# Altium PCB Harness_robottino.PcbDoc
Units mm, origin at the board's own origin, x right, y up, seen from the top; angles counter-clockwise.
Board outline 20 x 21.25 mm, 4 copper layers (Top Layer, Internal Plane 1, Internal Plane 2, Bottom Layer); 6 components, 8 nets, 34 pads, 2 vias.
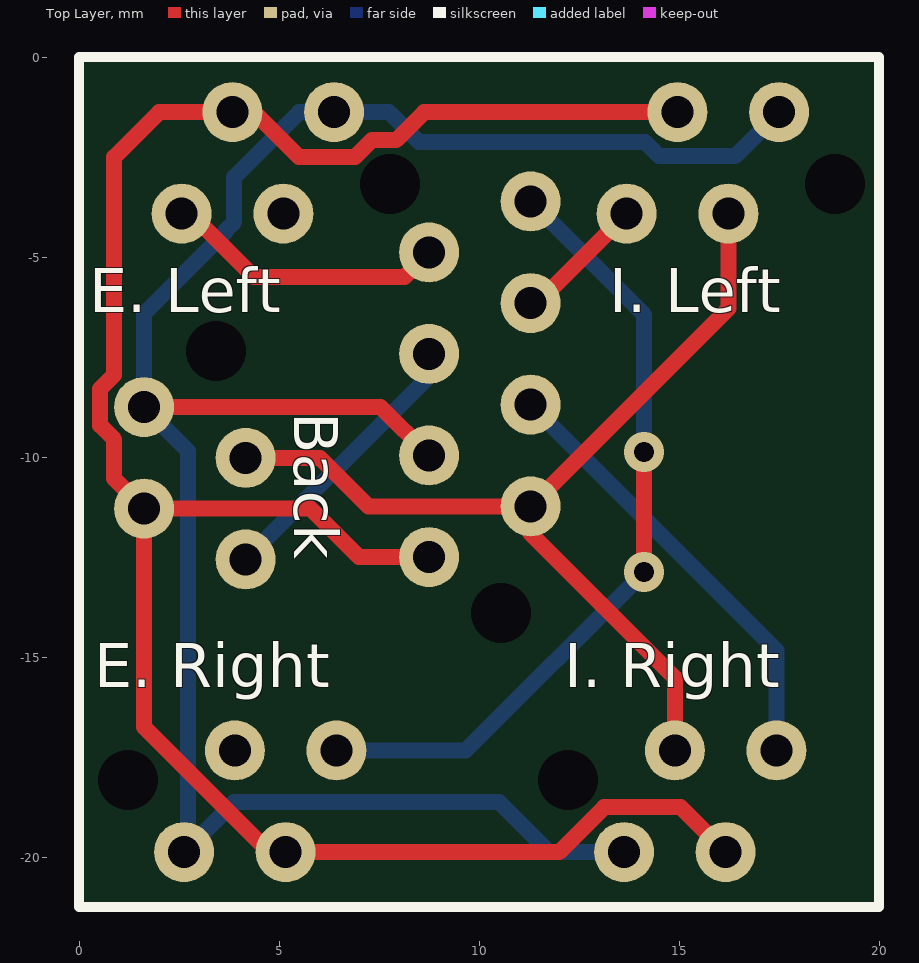
[diagram p0: Top Layer view]
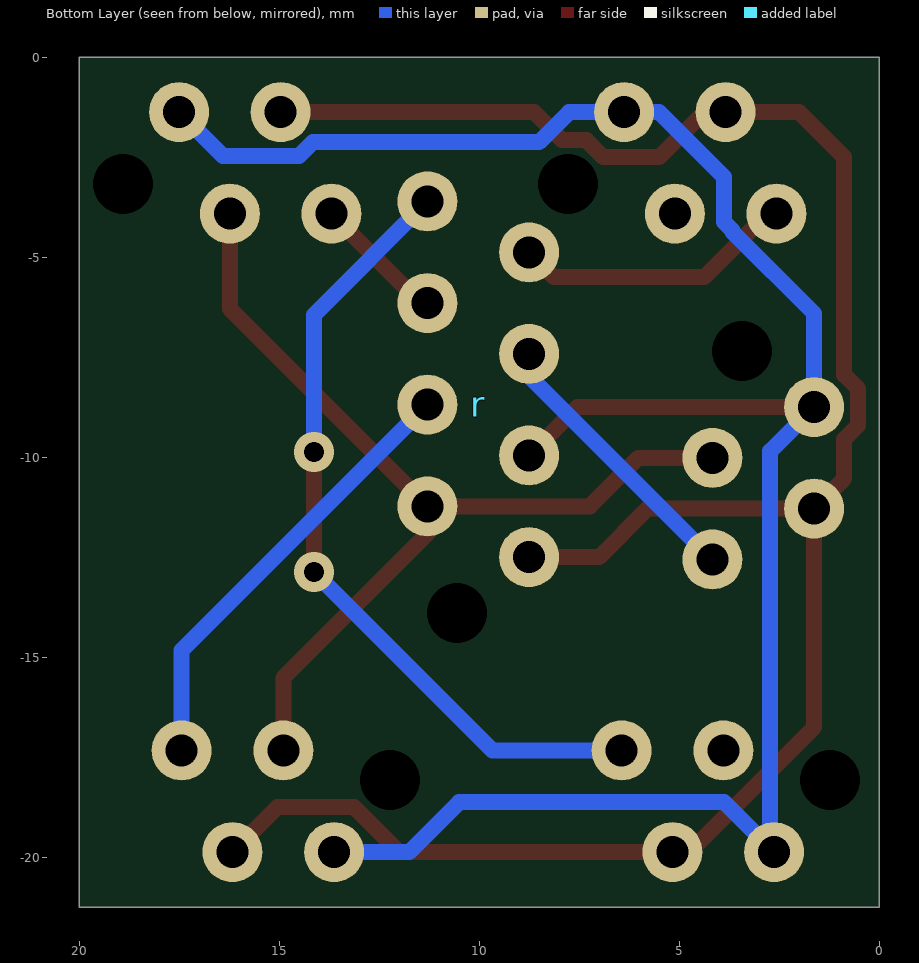
[diagram p1: Bottom Layer view, seen from below]
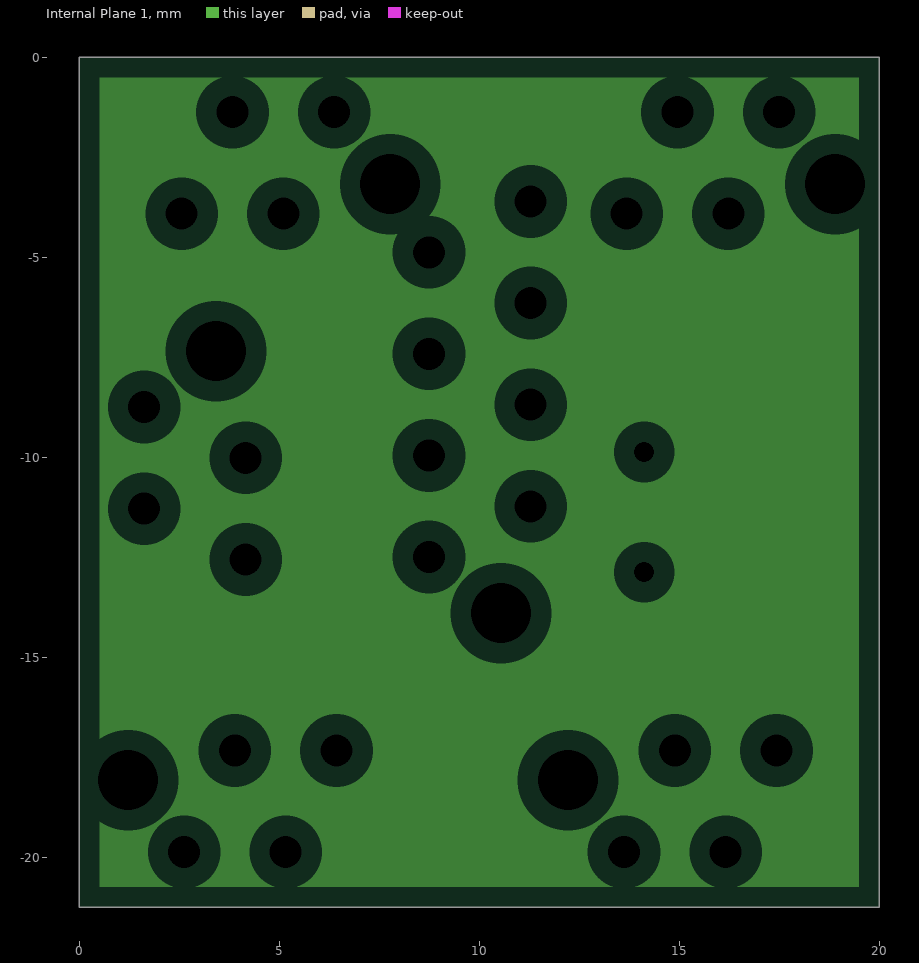
[diagram p2: Internal Plane 1, clearances drawn from the general rule]
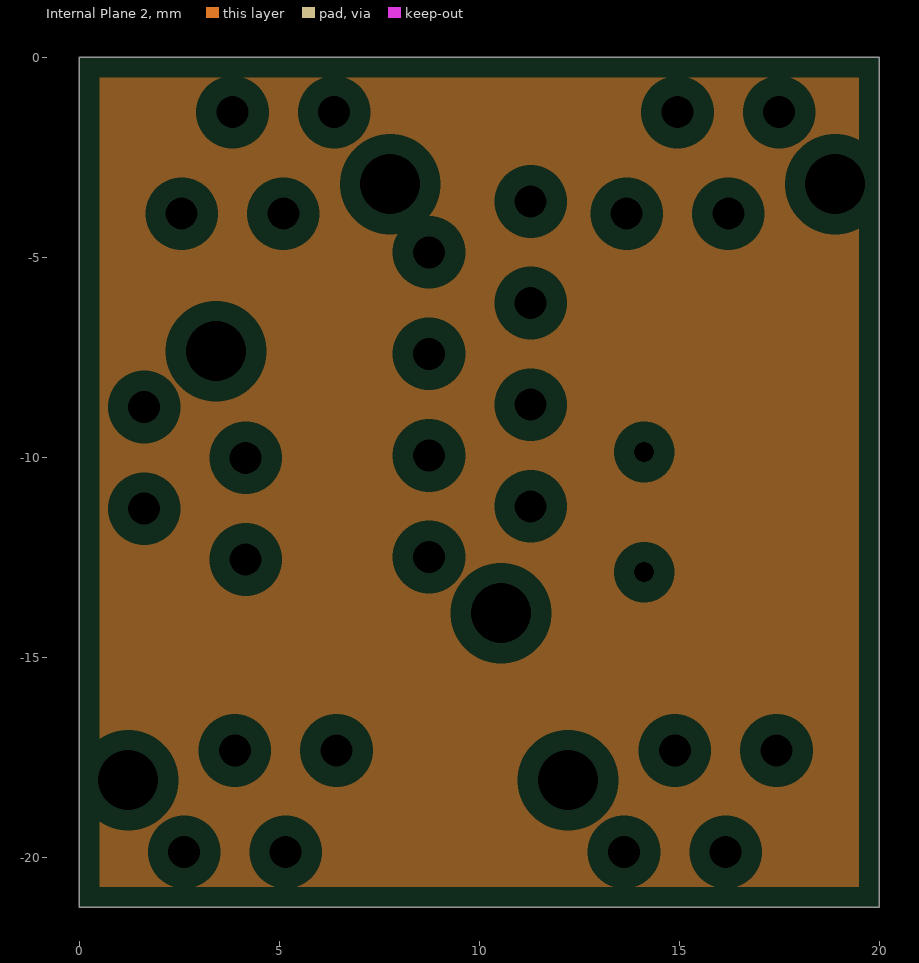
[diagram p3: Internal Plane 2, clearances drawn from the general rule]
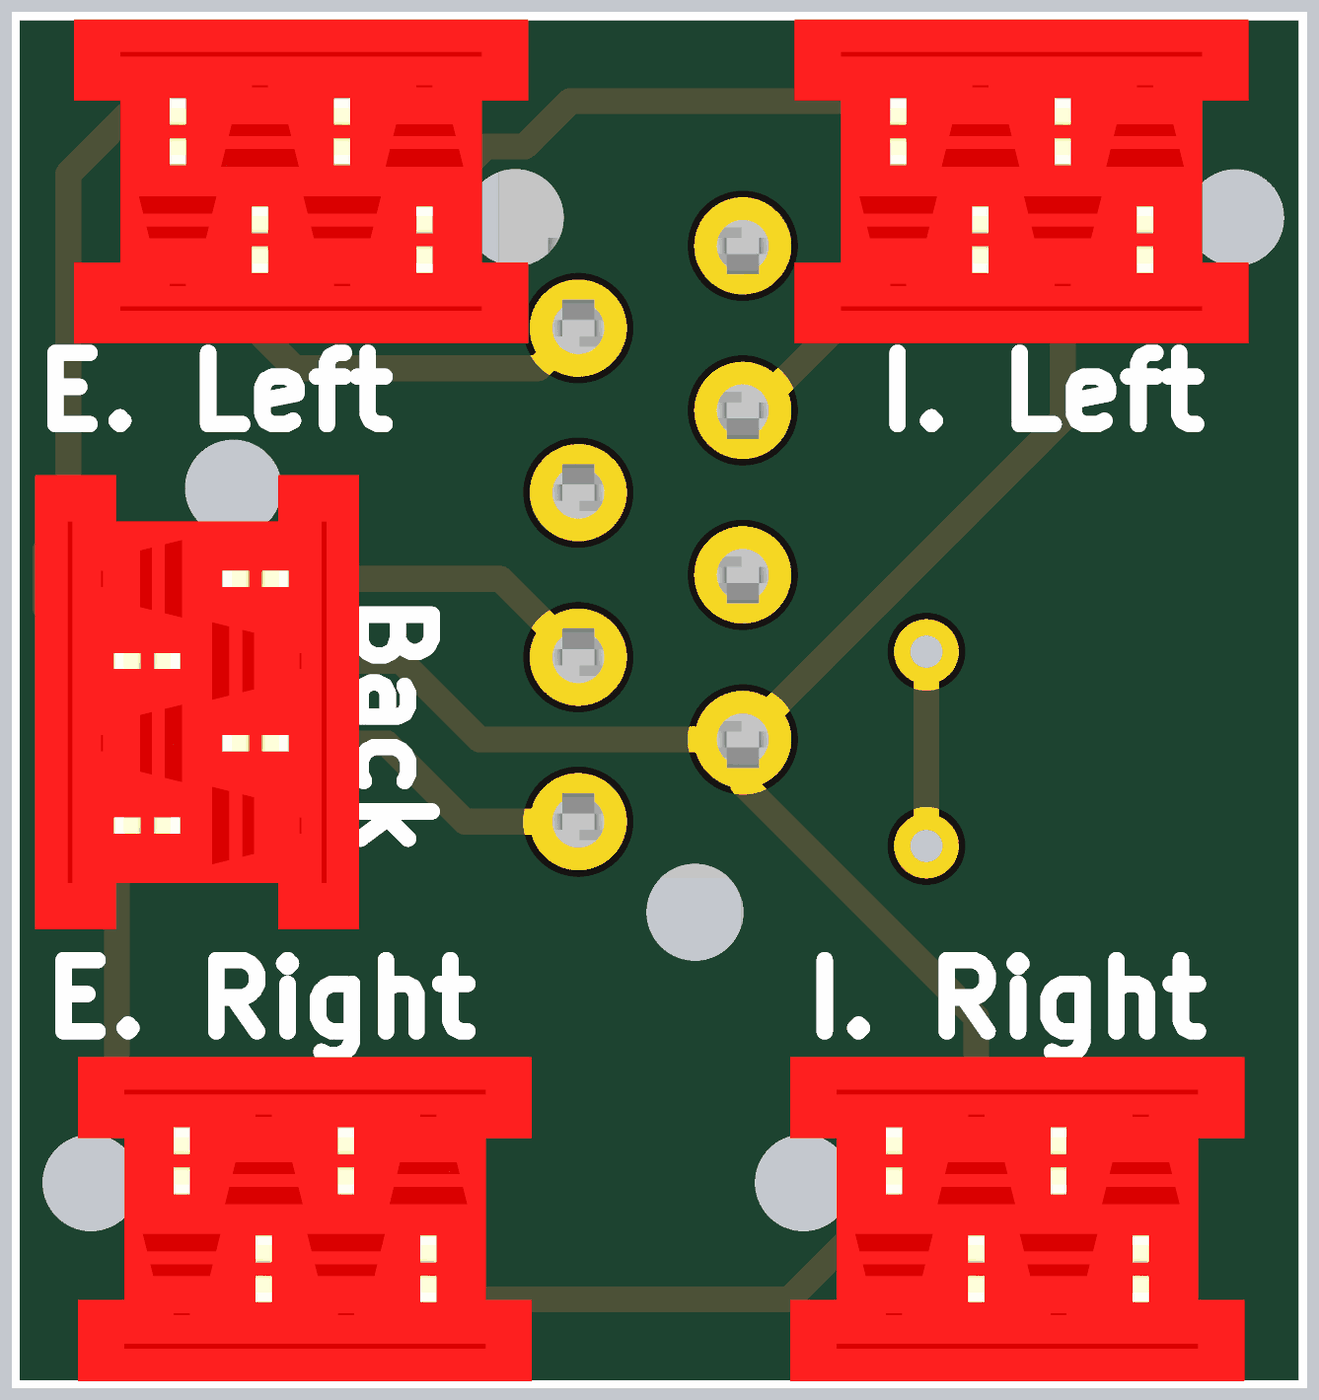
[diagram p4: 3D render of the assembled board from above, using the file's embedded part models]

## Layer stack, top to bottom
Top Layer: signal copper 0.0356
Dielectric: dielectric 0.32, FR-4, Dk 4.8
Internal Plane 1: plane copper 0.0356
Dielectric: dielectric 0.32, FR-4, Dk 4.8
Internal Plane 2: plane copper 0.0356
Dielectric: dielectric 0.32, FR-4, Dk 4.8
Bottom Layer: signal copper 0.0356

## Board outline
0,0 20,0 20,-21.25 0,-21.25

## Design rules (kind name [scope] priority, off if disabled: settings)
Clearance [All] p1: gap=0.15
PlaneClearance [All] p1: clearance=0.508
PlaneConnect [All] p1: planeconnectstyle=Direct reliefexpansion=0.508 reliefentries=4 reliefconductorwidth=0.254 reliefairgap=0.254
PolygonConnect PolygonConnect_nettie [InComponent('nt1') vs InNet('GND')] p1: connectstyle=Direct reliefconductorwidth=0.254 reliefentries=4 polygonreliefangle="90 Angle"
PolygonConnect PolygonConnect_pad [InComponent('U3') vs InNet('GND')] p2: connectstyle=Direct reliefconductorwidth=0.254 reliefentries=4 polygonreliefangle="90 Angle"
PolygonConnect [All] p3: connectstyle=Relief reliefconductorwidth=0.254 reliefentries=4 polygonreliefangle="90 Angle"
RoutingVias [All] p1: holewidth=0.35 width=0.6 viastyle="Through Hole" minholewidth=0.2 minwidth=0.4 maxholewidth=1.2 maxwidth=1
SilkscreenOverComponentPads [All] p1: minsilkscreentomaskgap=0.254
SolderMaskExpansion SolderMaskExpansion_via [IsVia] p1: expansion=-0.5
SolderMaskExpansion [All] p2: expansion=0.102
Width [All] p1: maxlimit=1 minlimit=0.203 preferedwidth=0.203
25 further rules are at their usual default settings.

## Components (designator, comment, footprint, x,y, rotation, side; value= is the part's Value field where it differs from the comment)
Back "I2C" TYCO/215079-4 1.625,-8.75 r90 top (schematic designator P2)
"E. Left" "I2C" TYCO/215079-4 6.375,-1.375 r0 top (schematic designator P5)
"E. Right" "I2C" TYCO/215079-4 2.625,-19.875 r180 top (schematic designator P6)
"I. Left" "I2C" TYCO/215079-4 17.5,-1.375 r0 top (schematic designator P1)
"I. Right" "I2C" TYCO/215079-4 13.625,-19.875 r180 top (schematic designator P3)
r "Header 8" TYCO/215079-8 8.75,-12.5 r270 bottom (schematic designator P4)

## Footprints (in the part's own frame and the unit in brackets; to place one, negate y for a bottom-side part, rotate by r counter-clockwise, add the part's x,y. Pads: shape width x height; smd on the part's side, far side on the other; paste and mask are expansions set on the pad)
TYCO/215079-4 [mm]
  round 1.5 hole 0.8: 1(0,0) 2(-1.27,-2.54) 3(-2.54,0) 4(-3.81,-2.54)
  round 1.3 hole 1.5 unplated: 5(1.4,-1.8)
  body extent -5.41,-3.74 1.6,1.26, height 4
TYCO/215079-8 [mm]
  round 1.3 hole 1.5 unplated: 0(1.4,-1.8)
  round 1.5 hole 0.8: 1(0,0) 2(-1.27,-2.54) 3(-2.54,0) 4(-3.81,-2.54) 5(-5.08,0) 6(-6.35,-2.54) 7(-7.62,0) 8(-8.89,-2.54)
  body extent -10.49,-3.77 1.6,1.23, height 4

## Part data
Back "E. Left" "E. Right" "I. Left" "I. Right": library part Micromatch-I2C, "Micromatch I2C Connector"
r: "Header, 8-Pin"

## Via types
v1: diameter 1, hole 0.5, Top Layer to Bottom Layer, 2 vias

## Nets (pads, with @x,y where several pads share a name; then routed paths per layer and width w, separated by ;. In a path a pad name is that pad's centre, name@x,y a point inside that pad or via, vN(x,y) a via of type N, cw(c..) or ccw(c..) an arc to the next point about the centre after c; other vN are vias at no path point)
GND: "E. Left.1" "E. Right.1" "I. Left.1" "I. Right.1" Back.1 r.3 | length 53.3
  Top Layer w0.4: Back.1 7.54,-8.75 r.3 ; 17.5,-1.625 17.5,-1.375
  Bottom Layer w0.4: 2.625,-19.875 2.725,-19.775 ; 13.625,-19.875 11.75,-19.875 10.5,-18.625 3.875,-18.625 2.725,-19.775 ; 17.5,-1.375 16.4,-2.475 14.504,-2.475 14.154,-2.125 8.5,-2.125 7.75,-1.375 6.375,-1.375 5.5,-1.375 3.875,-3 3.875,-4.125 3.665,-4.335 3.665,-4.371 1.625,-6.411 Back.1 2.725,-9.85 2.725,-19.775
IR3: "I. Right.4" r.4 | length 11.2
  Bottom Layer w0.4: r.4 17.435,-14.835 17.435,-17.335
IR4: Back.4 r.5 | length 7
  Bottom Layer w0.4: Back.4 8.75,-7.975 r.5
IR5: "I. Left.4" r.6 | length 3.3
  Top Layer w0.4: r.6 11.455,-6.15 13.69,-3.915
IR_SOURCE: "I. Left.2" "I. Right.2" Back.2 r.2 | length 24.6
  Top Layer w0.4: Back.2 6.02,-10.02 7.23,-11.23 r.2 ; 14.895,-17.335 14.895,-15.52 11.29,-11.915 r.2 ; 16.23,-3.915 16.23,-6.29 r.2
IRA: "E. Left.4" r.7 | length 7.1
  Top Layer w0.4: 2.565,-3.915 2.79,-3.915 4.375,-5.5 8.13,-5.5 r.7
IRB: "E. Right.4" r.8 | length 20
  Top Layer w0.4: v1(14.125,-12.875) v1(14.125,-9.875)
  Bottom Layer w0.4: 6.435,-17.335 9.665,-17.335 v1(14.125,-12.875) ; r.8 14.125,-6.445 v1(14.125,-9.875)
VCC: "E. Left.3" "E. Right.3" "I. Left.3" "I. Right.3" Back.3 r.1 | length 54.7
  Top Layer w0.4: r.1 7,-12.5 5.79,-11.29 Back.3 ; 14.96,-1.375 8.625,-1.375 7.925,-2.075 7.319,-2.075 6.894,-2.5 5.5,-2.5 4.375,-1.375 3.835,-1.375 2,-1.375 0.875,-2.5 0.875,-7.944 0.525,-8.294 0.525,-9.206 0.875,-9.556 0.875,-10.54 Back.3 ; 16.165,-19.875 15.04,-18.75 13.125,-18.75 12,-19.875 5.165,-19.875 4.75,-19.875 1.625,-16.75 Back.3
pads on no net: "E. Left.2" "E. Left.5" "E. Right.2" "E. Right.5" "I. Left.5" "I. Right.5" Back.5 r.0

## Polygon pours and split planes (outlines as drawn)
no net on Internal Plane 1 (split plane): 11.615,-0.615 0.51,-0.615 0.51,-0.51 11.615,-0.51
no net on Internal Plane 1 (split plane): 19.49,-20.74 0.51,-20.74 0.51,-1.635 12.125,-1.635 12.225,-1.626 12.32,-1.597 12.409,-1.549 12.486,-1.486 12.549,-1.409 12.597,-1.32 12.626,-1.225 12.635,-1.125 12.635,-0.51 19.49,-0.51
no net on Internal Plane 2 (split plane): 11.615,-0.615 0.51,-0.615 0.51,-0.51 11.615,-0.51
no net on Internal Plane 2 (split plane): 19.49,-20.74 0.51,-20.74 0.51,-1.635 12.125,-1.635 12.225,-1.626 12.32,-1.597 12.409,-1.549 12.486,-1.486 12.549,-1.409 12.597,-1.32 12.626,-1.225 12.635,-1.125 12.635,-0.51 19.49,-0.51

## Silkscreen, mask and mechanical layers (free items; w line width, h text height)
Top Overlay:
  the board outline again, w0.254